# Altium PCB PreCharge.PcbDoc (part 2 of 2)
Units mil, origin at the board's own origin, x right, y up, seen from the top; angles counter-clockwise.
Board outline 4330.71 x 3149.61 mil, 2 copper layers (Component Side, Bottom Layer), stack 12.8 mil thick; 87 components, 44 nets, 242 pads, 58 vias.
Unrouted connection lines stored in the file: 38.
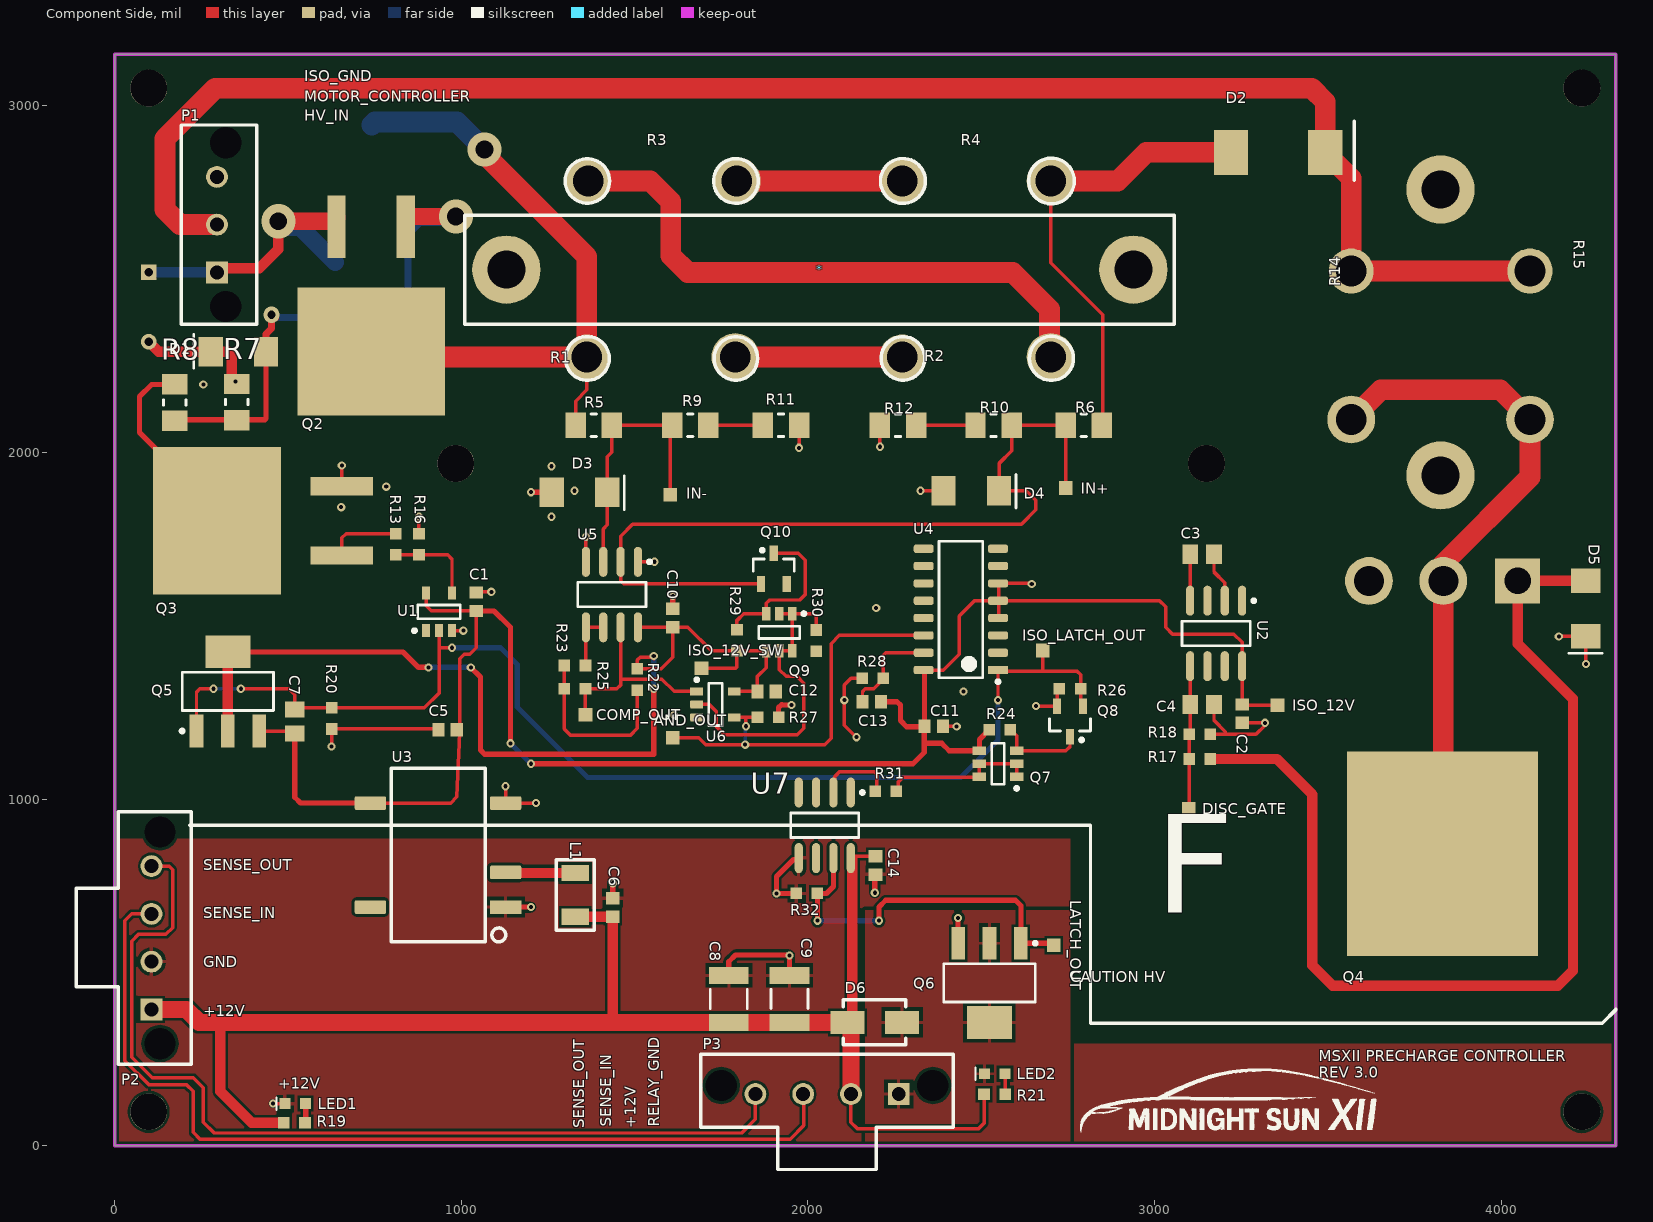
[diagram p0: Component Side view]

## Part data (continued)
R17: "RES SMD 40.2 OHM 0.5% 1/10W 0603", Manufacturer 1=Yageo, Manufacturer Part Number 1=RT0603DRE0740R2L, Operating Temperature="-55°C ~ 155°C", Package / Case="0603 (1608 Metric)", Power=1/10W, Resistance=40.2, Supplier Device Package=0603, Supplier Part Number 1=311-2576-1-ND, Temperature Coefficient=±50ppm/°C, Tolerance=±0.5%, ComponentLink1Description=http://www.yageo.com/documents/recent/PYu-RT_1-to-0.01_RoHS_L_7.pdf, ComponentLink1URL=http://www.yageo.com/documents/recent/PYu-RT_1-to-0.01_RoHS_L_7.pdf, Composition="Thin Film", Failure Rate=-, Height - Seated (Max)="0.022\" (0.55mm)", Packaging="Cut Tape (CT)", Part Status=Active, Size / Dimension="0.063\" L x 0.031\" W (1.60mm x 0.80mm)", Supplier 1=Digi-Key
R22: "100 Ohm ±1% 0.1W, 1/10W Chip Resistor 0603 (1608 Metric) Moisture Resistant Thick Film", Manufacturer 1=Yageo, Manufacturer Part Number 1=RC0603FR-07100RL, Operating Temperature="-55°C ~ 155°C", Package / Case="0603 (1608 Metric)", Power=1/10W, Resistance=100, Supplier Device Package=0603, Supplier Part Number 1=311-100HRCT-ND, Temperature Coefficient=±100ppm/°C, Tolerance=±1%, ComponentLink1Description=http://www.yageo.com/documents/recent/PYu-RC_Group_51_RoHS_L_7.pdf, ComponentLink1URL=http://www.yageo.com/documents/recent/PYu-RC_Group_51_RoHS_L_7.pdf, Composition="Thick Film", Failure Rate=-, Height - Seated (Max)="0.022\" (0.55mm)", Packaging="Cut Tape (CT)", Part Status=Active, Size / Dimension="0.063\" L x 0.031\" W (1.60mm x 0.80mm)", Supplier 1=Digi-Key
R23: "RES SMD 33K OHM 1% 1/4W 0603", Manufacturer 1="Panasonic Electronic Components", Manufacturer Part Number 1=ERJ-PA3F3302V, Operating Temperature="-55°C ~ 155°C", Package / Case="0603 (1608 Metric)", Power=1/4W, Resistance=33k, Supplier Device Package=0603, Supplier Part Number 1=P33KBYCT-ND, Temperature Coefficient=±100ppm/°C, Tolerance=±1%, ComponentLink1Description=https://industrial.panasonic.com/cdbs/www-data/pdf/RDO0000/AOA0000C291.pdf, ComponentLink1URL=https://industrial.panasonic.com/cdbs/www-data/pdf/RDO0000/AOA0000C291.pdf, Composition="Thick Film", Failure Rate=-, Height - Seated (Max)="0.022\" (0.55mm)", Packaging="Cut Tape (CT)", Part Status=Active, Size / Dimension="0.063\" L x 0.031\" W (1.60mm x 0.80mm)", Supplier 1=Digi-Key
R25: "RES SMD 6.8K OHM 1% 1/10W 0603", Manufacturer 1="Stackpole Electronics Inc.", Manufacturer Part Number 1=RMCF0603FT6K80, Operating Temperature="-55°C ~ 155°C", Package / Case="0603 (1608 Metric)", Power=1/10W, Resistance=6.8k, Supplier Device Package=0603, Supplier Part Number 1=RMCF0603FT6K80CT-ND, Temperature Coefficient=±100ppm/°C, Tolerance=±1%, ComponentLink1Description=https://www.seielect.com/Catalog/SEI-RMCF_RMCP.pdf, ComponentLink1URL=https://www.seielect.com/Catalog/SEI-RMCF_RMCP.pdf, Composition="Thick Film", Failure Rate=-, Height - Seated (Max)="0.022\" (0.55mm)", Packaging="Cut Tape (CT)", Part Status=Active, Size / Dimension="0.061\" L x 0.031\" W (1.55mm x 0.80mm)", Supplier 1=Digi-Key
R31: library part "RES 1K OHM 5% 1/10W 0603", "1k Ohm ±5% 0.1W, 1/10W Chip Resistor 0603 (1608 Metric)", Manufacturer=Yageo, Manufacturer Part Number=RC0603JR-071KL, Operating Temperature="-55°C ~ 155°C", Package / Case="0603 (1608 Metric)", Power (Watts)="0.1W, 1/10W", Resistance (Ohms)=1k, Supplier Device Package=0603, Supplier Part Number 1=311-1.0KGRCT-ND, Temperature Coefficient=±100ppm/°C, Tolerance=±5%, Category=Resistors, ComponentLink1Description=http://www.yageo.com/documents/recent/PYu-RC_Group_51_RoHS_L_7.pdf, ComponentLink1URL=http://www.yageo.com/documents/recent/PYu-RC_Group_51_RoHS_L_7.pdf, Composition="Thick Film", Failure Rate=-, Features="Moisture Resistant", Height - Seated (Max)="0.022\" (0.55mm)", Packaging="Cut Tape (CT)", Part Status=Active, Pricing 1="1=0.15, 10=0.017, 100=0.0071, 1000=0.0032, 2500=0.00278 (CAD)", RoHS="RoHS Compliant", Size / Dimension="0.063\" L x 0.031\" W (1.60mm x 0.80mm)", Stock 1=4415240, Supplier 1=Digi-Key
U1: library part "IC INVERTER SCHMITT 1CH 5SSOP", "Inverter IC 1 Channel Schmitt Trigger 5-SSOP", Case/Package=SSOP, High Level Output Current=3.4mA, Manufacturer=Rohm, Manufacturer Part Number=BU4S584G2-TR, Max Operating Temperature=85°C, Max Supply Voltage=16V, Min Operating Temperature=-40°C, Min Supply Voltage=3V, Package Quantity=3000, Quiescent Current=1uA, Supplier Part Number 1=BU4S584G2DKR-ND, ComponentLink1Description=https://datasheet.ciiva.com/16203/bu4s584g2-e-16203782.pdf, ComponentLink1URL=https://datasheet.ciiva.com/16203/bu4s584g2-e-16203782.pdf, ComponentLink2Description=https://datasheet.ciiva.com/8247/bu4s01g2-e-8247480.pdf, ComponentLink2URL=https://datasheet.ciiva.com/8247/bu4s01g2-e-8247480.pdf, ComponentLink3Description=https://datasheet.ciiva.com/1863/bu4s01g2-e-1863485.pdf, ComponentLink3URL=https://datasheet.ciiva.com/1863/bu4s01g2-e-1863485.pdf, ComponentLink4Description=https://datasheet.ciiva.com/1863/bu4s01g2-e-1863486.pdf, ComponentLink4URL=https://datasheet.ciiva.com/1863/bu4s01g2-e-1863486.pdf, ComponentLink5Description=https://datasheet.ciiva.com/15089/getdatasheetpartid-451247-15089726.pdf, ComponentLink5URL=https://datasheet.ciiva.com/15089/getdatasheetpartid-451247-15089726.pdf, ComponentLink6Description=https://datasheet.ciiva.com/1863/bu4s01g2-e-1863487.pdf, ComponentLink6URL=https://datasheet.ciiva.com/1863/bu4s01g2-e-1863487.pdf, ComponentLink7Description=https://datasheet.ciiva.com/26865/bu4s584g2-tr-26865344.pdf, ComponentLink7URL=https://datasheet.ciiva.com/26865/bu4s584g2-tr-26865344.pdf, ComponentLink8Description=https://datasheet.ciiva.com/26326/140506-da-01-en-ic-bu4s584g2-tr-ssop5-26326013.pdf, ComponentLink8URL=https://datasheet.ciiva.com/26326/140506-da-01-en-ic-bu4s584g2-tr-ssop5-26326013.pdf, Contact Plating=Copper,Tin, Lead Free="Lead Free", Logic Function="Schmitt Trigger,Buffer,Inverter", Low Level Output Current=3.4mA, Mount="Surface Mount", Number of Circuits=1, Number of Elements=1, Number of Gates=1, Number of Inputs=1, Number of Pins=5, Packaging="Tape and Reel", Pricing 1="1=0.68, 10=0.571, 25=0.4996, 100=0.4283, 250=0.37116, 500=0.31406, 1000=0.24269 (USD)", Propagation Delay=50ns, Radiation Hardening=No, REACH SVHC=Unknown, Stock 1=28906, Supplier 1=Digi-Key, Turn-On Delay Time=50ns
U2: "Charge Pump Switching Regulator IC Positive or Negative Fixed -Vin, 2Vin 1 Output 20mA 8-SOIC (0.154\", 3.90mm Width)", Case/Package=SOIC, Manufacturer=Microchip, Manufacturer Part Number=TC7662BEOA713, Max Input Voltage=15V, Max Operating Temperature=85°C, Max Output Current=20mA, Max Output Voltage=-15V, Min Operating Temperature=-40°C, Min Supply Voltage=1.5V, Output Power=470mW, Package Quantity=1, Supplier Part Number 1=TC7662BEOA713CT-ND, Switching Frequency=35kHz, ComponentLink1Description=https://datasheet.ciiva.com/2024/21469a-2024368.pdf, ComponentLink1URL=https://datasheet.ciiva.com/2024/21469a-2024368.pdf, ComponentLink2Description=https://datasheet.ciiva.com/2024/filehandler-aspxddocname-en026002-2024369.pdf, ComponentLink2URL=https://datasheet.ciiva.com/2024/filehandler-aspxddocname-en026002-2024369.pdf, ComponentLink3Description=https://datasheet.ciiva.com/16295/filehandler-aspxddocname-en011347-16295442.pdf, ComponentLink3URL=https://datasheet.ciiva.com/16295/filehandler-aspxddocname-en011347-16295442.pdf, ComponentLink4Description=https://datasheet.ciiva.com/3216/cn-21469a-3216331.pdf, ComponentLink4URL=https://datasheet.ciiva.com/3216/cn-21469a-3216331.pdf, ComponentLink5Description=https://datasheet.ciiva.com/18553/filehandler-aspxddocname-en026002-18553038.pdf, ComponentLink5URL=https://datasheet.ciiva.com/18553/filehandler-aspxddocname-en026002-18553038.pdf, ComponentLink6Description=https://datasheet.ciiva.com/4875/21469a-4875151.pdf, ComponentLink6URL=https://datasheet.ciiva.com/4875/21469a-4875151.pdf, Height=1.5mm, Lead Free="Lead Free", Length=5mm, Logic Function=Inverting, Max Supply Voltage=15V, Mount="Surface Mount", Number of Outputs=1, Number of Pins=8, Output Current=20mA, Output Voltage=-15V, Packaging="Tape and Reel", Pricing 1="1=2.29, 25=1.9056, 100=1.7304 (USD)", Radiation Hardening=No, Stock 1=59, Supplier 1=Digi-Key, Synchronous Rectifier=No, Topology="Charge Pump", Weight=0.006596oz, Width=3.99mm
U3: "Isolated Module DC DC Converter 1 Output 12V 84mA 10.8V - 13.2V Input", Current - Output (Max)=84mA, Manufacturer 1="XP Power", Manufacturer Part Number 1=ISE1212A, Operating Temperature="-40°C ~ 105°C", Package / Case="8-SMD Module, 5 Leads", Power=1W, Supplier Part Number 1=1470-2950-1-ND, Voltage - Input (Max)=13.2V, Voltage - Input (Min)=10.8V, Voltage - Isolation="1.5kV (1500V)", Voltage - Output 1=12V, Voltage - Output 2=-, ComponentLink1Description=http://www.xppower.com/Portals/0/pdfs/SF_ISE.pdf, ComponentLink1URL=http://www.xppower.com/Portals/0/pdfs/SF_ISE.pdf, Efficiency=81%, Mounting Type="Surface Mount", Number of Outputs=1, Packaging="Cut Tape (CT)", Part Status=Active, Size / Dimension="0.50\" L x 0.44\" W x 0.29\" H (12.7mm x 11.2mm x 7.3mm)", Supplier 1=Digi-Key, Type="Isolated DCDC", Voltage - Output 3=-
U4: "S-R Latch 4 Channel 1:1 IC Tri-State 16-TSSOP", Current - Output High, Low="6.8mA, 6.8mA", Manufacturer 1="Texas Instruments", Manufacturer Part Number 1=CD4043BDR, Operating Temperature="-55°C ~ 125°C", Package / Case="16-SOIC (0.154\", 3.90mm Width)", Supplier Device Package=16-SOIC, Supplier Part Number 1=296-31496-1-ND, Voltage - Supply="3 V ~ 18 V", Circuit=1:1, ComponentLink1Description=http://www.ti.com/lit/ds/symlink/cd4043b.pdf, ComponentLink1URL=http://www.ti.com/lit/ds/symlink/cd4043b.pdf, Delay Time - Propagation=50ns, Logic Type="S-R Latch", Mounting Type="Surface Mount", Output Type=Tri-State, Packaging="Cut Tape (CT)", Part Status=Active, Supplier 1=Digi-Key
U5: "Comparator General Purpose DTL, MOS, Open-Collector, Open-Emitter, RTL, TTL 8-SOIC", Current - Input Bias (Max)="0.25µA @ ±15V", Current - Output (Typ)=-, Current - Quiescent (Max)=7.5mA, Manufacturer 1="Texas Instruments", Manufacturer Part Number 1=LM311M/NOPB, Operating Temperature="0°C ~ 70°C", Package / Case="8-SOIC (0.154\", 3.90mm Width)", Supplier Device Package=8-SOIC, Supplier Part Number 1=LM311MNS/NOPB-ND, Voltage - Input Offset (Max)="7.5mV @ ±15V", Voltage - Supply, Single/Dual (±)="5 V ~ 36 V, ±2.5 V ~ 18 V", CMRR, PSRR (Typ)=-, ComponentLink1Description=http://www.ti.com/lit/ds/symlink/lm311-n.pdf, ComponentLink1URL=http://www.ti.com/lit/ds/symlink/lm311-n.pdf, Hysteresis=-, Mounting Type="Surface Mount", Output Type="DTL, MOS, Open-Collector, Open-Emitter, RTL, TTL", Packaging=Tube, Part Status=Active, Propagation Delay (Max)=-, Supplier 1=Digi-Key, Type="General Purpose"
U6: "AND Gate IC 1 Channel 5-SSOP", Current - Output High, Low="3.4mA, 3.4mA", Current - Quiescent (Max)=1µA, Manufacturer 1="Rohm Semiconductor", Manufacturer Part Number 1=BU4S81G2-TR, Operating Temperature="-40°C ~ 85°C", Package / Case="SC-74A, SOT-753", Supplier Device Package=5-SSOP, Supplier Part Number 1=BU4S81G2CT-ND, Voltage - Supply="3 V ~ 16 V", ComponentLink1Description=http://rohmfs.rohm.com/en/products/databook/datasheet/ic/logic_switch/standard_logic/bu4s81g2-e.pdf, ComponentLink1URL=http://rohmfs.rohm.com/en/products/databook/datasheet/ic/logic_switch/standard_logic/bu4s81g2-e.pdf, Logic Level - High="3.5 V ~ 11 V", Logic Level - Low="1.5 V ~ 4 V", Logic Type="AND Gate", Max Propagation Delay @ V, Max CL="30ns @ 15V, 50pF", Mounting Type="Surface Mount", Number of Circuits=1, Number of Inputs=2, Packaging="Cut Tape (CT)", Part Status=Active, Supplier 1=Digi-Key
U7: "Logic Output Optoisolator 5MBd Push-Pull, Totem Pole 3750Vrms 1 Channel 5kV/µs, 10kV/µs CMTI 8-SO Tall", Supplier Part Number 1=516-1625-5-ND, ComponentLink1Description=https://www.digikey.ca/products/en?keywords=HCPL-0211-000E, ComponentLink1URL=https://www.digikey.ca/products/en?keywords=HCPL-0211-000E, Supplier 1=Digi-Key

## Free pads (board coordinates)
  round 106.3 hole 106.3: ""(98.43,98.43) ""(98.43,3051.18) ""(984.25,1968.5) ""(3149.61,1968.5) ""(4232.28,98.43) ""(4232.28,3051.18)

## Via types
v1: diameter 23.62, hole 11.81, Component Side to Bottom Layer, tented both sides, 54 vias
v2: diameter 98.43, hole 51.18, Component Side to Bottom Layer, tented both sides, 2 vias
v3: diameter 47.24, hole 23.62, Component Side to Bottom Layer, tented both sides, 1 vias
v4: diameter 98.43, hole 51.18, Component Side to Bottom Layer, 1 vias

## Nets (pads, with @x,y where several pads share a name; then routed paths per layer and width w, separated by ;. In a path a pad name is that pad's centre, name@x,y a point inside that pad or via, vN(x,y) a via of type N, cw(c..) or ccw(c..) an arc to the next point about the centre after c; other vN are vias at no path point)
+12V: C6.2 C8.1 C9.1 C14.1 D6.2 L1.1 P2.1 P3.2 R19.2 R21.1 U7.8 | length 4177.6
  Component Side w10: P3.2 2124.02,67.91 2141.73,50.2 2493.11,50.2 2507.87,64.96 R21.1 ; U7.8@2127.36,826.54 2136.46,835.63 C14.1
  Component Side w30: 305.12,356.3 305.12,157.48 395.67,66.93 R19.2 ; L1.1 C6.2 1437.01,356.3 ; D6.2 2127.36,369.49 U7.8@2127.36,826.54
  Component Side w50: P2.1 206.69,393.7 244.09,356.3 305.12,356.3 1437.01,356.3 C8.1 C9.1 D6.2 2124.02,346.46 P3.2
GND: C6.1 C8.2 C9.2 C14.2 LED1.2 P2.2 Q6.3 R32.2 U3.1 U7.5 | length 742.6
  Component Side w10: v1(456.69,122.05) LED1.2
  Component Side w15: U3.1 v1(1200.79,688.98) ; C6.1 v1(1437.01,757.87) ; C8.2 1771.65,531.5 1791.34,551.18 1944.88,551.18 v1(1946.85,549.21) C9.2 ; R32.2 v1(1909.45,728.35) 1909.45,777.56 1958.43,826.54 U7.5@1977.36,826.54 ; v1(2192.91,730.31) C14.2@2192.91,773.62 ; Q6.3 v1(2433.07,657.48)
HV_IN: F1.1 P1.1 | length 196.9
  Bottom Layer w30: F1.1 P1.1
ISO_12V: C1.1 C2.2 C5.2 C7.1 C11.2 C13.2 ISO_12V.TP Q5.3 Q7.4 R24.1 U1.5 U2.8 U3.5 U4.5 U4.16 | length 5262.4
  Component Side w10: Q5.3 C7.1@519.68,1196.85 ; U3.5 969.29,988.98 987.2,1006.89 996.06,1192.91 996.06,1405.51 1008.41,1417.86 1024.15,1417.86 1043.31,1437.01 C1.1 913.39,1543.31 898.43,1558.27 U1.5 ; U4.16 2390.35,1372.63 2436.18,1418.46 2436.18,1528.5 2480.31,1572.63 U4.5@2532.16,1572.63 ; U4.5@2567.91,1572.63 3013.98,1572.63 3031.5,1555.12 3031.5,1496.49 3051.61,1476.38 3228.35,1476.38 3252.36,1452.36 U2.8 C2.2 ; C2.2@3254.33,1271.65 ISO_12V.TP
  Component Side w15: C7.1 519.68,1005.91 536.61,988.98 U3.5 ; C1.1 1094.49,1543.31 1141.73,1496.06 v1(1141.73,1161.42) ; v1(1200.79,1102.36) 2303.31,1102.36 2335.47,1134.52 2335.47,1161.42 ; C13.2 2257.12,1281.19 2266.65,1271.65 2266.65,1227.13 2284.45,1209.34 C11.2@2335.47,1209.34 ; U4.16 2336.45,1369.84 C11.2 C11.2@2335.47,1209.34 ; R24.1 2494.49,1172.48 Q7.4 2407.32,1139.76 2385.66,1161.42 2335.47,1161.42 ; C2.2 C2.2@3254.33,1271.65 ; 2335.47,1161.42 C11.2@2335.47,1209.34
  Bottom Layer w15: v1(1141.73,1161.42) v1(1200.79,1102.36)
ISO_12V_SW: C10.2 C12.2 ISO_12V_SW.TP Q5.2 Q5.4 Q9.4 R22.1 R29.1 U5.8 U6.5 | length 3017.8
  Component Side w10: U5.8 C10.2 ; v1(1555.12,1413.39) 1555.12,1405.51 1551.18,1409.45 1515.75,1409.45 1507.87,1401.57 R22.1 1576.77,1375.98 1610.24,1409.45 C10.2 ; ISO_12V_SW.TP 1791.34,1377.95 1795.28,1381.89 R29.1 ; U6.5 C12.2 1854.33,1354.33 1879.92,1379.92 Q9.4 R29.1 ; C10.2 1653.54,1496.06 1721.65,1427.95 R29.1
  Component Side w15: Q5.4 832.28,1425.2 876.98,1380.5 v1(905.51,1380.5) ; v1(1027.56,1380.5) 1055.12,1352.94 1055.12,1141.73 1066.93,1129.92 1555.12,1129.92 v1(1555.12,1318.9)
  Component Side w30: Q5.2 Q5.4
  Bottom Layer w15: v1(905.51,1380.5) v1(1027.56,1380.5) ; v1(1555.12,1318.9) v1(1555.12,1413.39)
ISO_GND: C1.2 C2.1 C4.2 C5.1 C10.1 C11.1 C12.1 D3.1 D4.1 D5.2 P1.3 Q3.3 Q4.3 Q8.2 Q10.2 R11.2 R12.2 R16.2 R18.2 R20.2 R26.1 R27.1 R28.1 R30.2 U1.3 U2.3 U3.4 U4.3 U4.4 U4.6 U4.7 U4.8 U4.11 U4.12 U5.1 U5.4 U6.3 U7.3 | length 2255.5
  Component Side w10: v1(625.98,1152.56) R20.2 C5.1@925.98,1202.76 ; Q3.3 v1(655.51,1962.6) ; R16.2 v1(877.95,1814.96) ; U1.3 v1(1005.91,1486.22) ; C1.2 1043.31,1598.43 v1(1086.61,1598.43) ; v1(1127.95,1037.4) U3.4 v1(1215.75,988.98) ; U5.4 v1(1359.45,1757.09) ; U5.1 v1(1557.09,1685.04) ; v1(1974.41,2013.78) R11.2 ; v1(2139.76,1179.13) 2104.88,1214.02 v1(2104.88,1285.75) 2104.88,1329.53 2124.21,1348.85 R28.1 ; v1(2207.68,2016.73) R12.2 ; v1(2324.8,1889.76) D4.1 ; U4.12 U4.12@2353.08,1572.63 ; C11.1 v1(2428.97,1210.32) ; U4.6 U4.6@2550.04,1622.63 ; U4.4@2550.04,1533.35 U4.6@2550.04,1622.63 ; v1(2645.57,1621.06) 2644,1622.63 U4.6@2550.04,1622.63 ; v1(2657.48,1268.7) Q8.2 2718.5,1312.01 R26.1 ; R18.2 3203.74,1187.01 ; C4.2 3171.26,1227.36 3203.74,1194.88 3203.74,1187.01 ; C2.1 v1(3317.91,1220.47) 3317.91,1212.6 3292.32,1187.01 3203.74,1187.01 ; v1(4165.91,1469.92) D5.2 v1(4244.09,1389.76)
  Component Side w15: C5.1@925.98,1202.76 C5.1@935.83,1192.91 ; v1(1200.79,1885.83) D3.1 ; C10.1 v1(1610.24,1586.61) ; U6.3@1677.17,1234.25 U6.3 ; R27.1 1915.35,1264.76 1924.21,1273.62 1926.18,1271.65 v1(1952.76,1271.65)
  other v1: 1613.19,1243.11 2448.66,1310.54 2196.85,1551.74 1259.84,1814.96 653.54,1842.52 1326.77,1889.76 783.46,1901.57 1259.84,1960.63 255.91,2196.79
NetAND_OUT_TP: AND_OUT.TP R27.2 U4.14 U6.4 | length 1160.5
  Component Side w10: AND_OUT.TP 1685.04,1177.17 1704.73,1157.48 v1(1818.89,1157.48) 2048.41,1157.48 2066.84,1175.9 2066.84,1448.92 2090.55,1472.63 2320.92,1472.63 U4.14@2317.6,1475.95 ; U6.4 1820.87,1236.22 ; v1(1820.87,1210.63) 1820.87,1236.22 ; R27.2 1820.87,1236.22
  Bottom Layer w10: v1(1818.89,1157.48) 1818.89,1208.66 v1(1820.87,1210.63)
NetC3_1: C3.1 U2.2 | length 146.7
  Component Side w10: C3.1 3171.26,1655.51 3202.36,1624.41 U2.2
NetC3_2: C3.2 U2.4 | length 133.9
  Component Side w10: U2.4 C3.2
NetC4_1: C4.1 DISC_GATE.TP R17.1 R18.1 U2.5 | length 413
  Component Side w10: DISC_GATE.TP 3099.41,973.43 R17.1 R18.1 3102.36,1189.96 C4.1 U2.5
NetC7_2: C7.2 ISO_LATCH_OUT.TP Q5.1 Q8.3 R20.1 R26.2 U1.2 U4.1 | length 3522.8
  Component Side w10: Q5.1 236.22,1309.06 246.06,1318.9 v1(285.43,1318.9) ; v1(364.17,1318.9) 501.97,1318.9 519.68,1301.18 C7.2 ; C7.2@543.31,1265.75 545.28,1263.78 R20.1 893.7,1263.78 935.83,1305.91 935.83,1437.01 ; U1.2 935.83,1437.01 ; v1(973.23,1437.01) 935.83,1437.01 ; v1(2548.23,1285.75) U4.1 2551.02,1369.84 2677.17,1369.84 ; ISO_LATCH_OUT.TP 2677.17,1369.84 ; Q8.3 2786.42,1275.59 R26.2 2786.42,1359.01 2775.59,1369.84 2677.17,1369.84
  Bottom Layer w10: v1(285.43,1318.9) v1(364.17,1318.9)
  Bottom Layer w15: v1(973.23,1437.01) 1113.24,1437.01 1161.42,1388.83 1161.42,1266.16 1364.59,1062.99 2440.94,1062.99 2548.23,1170.28 v1(2548.23,1285.75)
NetC13_1: C13.1 R28.2 U4.15 | length 292.6
  Component Side w10: C13.1 2157.32,1310.54 2165.2,1318.42 2189.48,1318.42 2217.43,1346.36 R28.2 2217.43,1415.46 2224.6,1422.63 U4.15
NetCOMP_OUT_TP: COMP_OUT.TP R25.2 U5.7 U6.1 | length 581.3
  Component Side w10: COMP_OUT.TP R25.2 1448.82,1318.9 1459.45,1329.53 1459.45,1346.46 ; U5.7 1459.45,1346.46 ; U6.1 1614.17,1311.02 1578.82,1346.38 1485.81,1346.38 1485.73,1346.46 1459.45,1346.46
NetD1_1: D1.1 Q1.1 Q2.1 R7.2 R8.1 | length 1463.5
  Component Side w15: R8.1@173.23,2094.49 358.27,2094.49 433.07,2094.49 437.01,2098.43 437.01,2273.07 D1.1@446.14,2282.2
  Component Side w20: D1.1 437.01,2342.52 452.76,2358.27 v3(452.76,2397.63) 455.59,2397.63 v3@464.57,2388.66
  Component Side w50: Q2.1@841.73,2681.1 v2(984.25,2681.1)
  Bottom Layer w20: v3(452.76,2397.63) 456.69,2397.63 456.69,2405.51 472.44,2389.76 775.59,2389.76 846.46,2460.63 Q1.1@846.46,2584.65
  Bottom Layer w50: Q1.1@841.73,2584.65 841.73,2593.38 841.73,2644.88 875,2678.15 v2@939.96,2678.15 ; v2(984.25,2681.1) v2@984.25,2687.01
NetD1_2: D1.2 F1.2 Q1.3 Q2.3 R7.1 | length 1044.7
  Component Side w15: D1.2@299.21,2295.28 D1.2@307.09,2295.28
  Component Side w30: F1.2 126.77,2291.34 D1.2 328.66,2291.34 337.8,2282.2 337.8,2207.41 352.62,2207.41 R7.1 ; 295.28,2530.75 295.28,2519.68 307.09,2531.5 417.32,2531.5 472.44,2586.61 v4(472.44,2667.32)
  Component Side w50: v4(472.44,2667.32) 631.89,2667.32 Q2.3@641.73,2677.17
  Bottom Layer w50: v4(472.44,2667.32) 475.76,2667.32 492.88,2650.2 535.24,2650.2 Q1.3
NetD2_1: D2.1 P1.2 R14.1 R15.1 | length 4830.3
  Component Side w60: P1.2 188.98,2657.48 145.67,2700.79 145.67,2905.51 291.34,3051.18 3452.76,3051.18 3492.13,3011.81 D2.1 3566.93,2791.34 R14.1 R15.1
NetD2_2: D2.2 R4.2 R6.1 | length 1323
  Component Side w10: R4.2 2700,2548.03 2850.39,2397.64 2850.39,2081.69 R6.1
  Component Side w60: R4.2 2893.7,2783.46 2976.38,2866.14 D2.2
NetD3_2: D3.2 IN-.TP R5.2 R9.1 U5.3 | length 781.3
  Component Side w10: U5.3 1409.45,1779.53 1421.26,1791.34 D3.2 1421.26,1988.19 1434.06,2000.98 R5.2 R9.1 1602.36,2072.83 IN-.TP
NetD4_2: D4.2 IN+.TP Q10.3 R6.2 R10.1 U5.2 | length 2452.5
  Component Side w10: Q10.3 1469.19,1621.06 1459.45,1630.8 U5.2 1459.45,1758.66 1493.94,1793.15 2615.98,1793.15 2657.48,1834.65 2657.48,1862.2 2629.92,1889.76 D4.2 2551.18,1968.5 2587.6,2004.92 R10.1 R6.2 2744.09,2077.76 IN+.TP
NetD5_1: D5.1 Q4.1 R17.2 | length 3010.1
  Component Side w30: R17.2 3352.36,1116.14 3454.72,1013.78 3454.72,521.65 3513.78,462.6 4163.39,462.6 4206.69,505.91 4206.69,1289.37 4047.24,1448.82 Q4.1 D5.1
NetL1_2: L1.2 U3.2 | length 201.4
  Component Side w30: U3.2 1129.53,787.4 L1.2
NetLATCH_OUT_TP: LATCH_OUT.TP Q6.1 R32.1 U7.7 | length 1061.2
  Component Side w15: v1(2027.36,649.8) R32.1 2053.72,728.35 2073.43,748.05 U7.7 ; v1(2204.53,649.8) 2204.53,688.78 2224.41,708.66 2598.43,708.66 2614.17,692.91 Q6.1 2702.76,584.65 LATCH_OUT.TP
  Bottom Layer w15: v1(2027.36,649.8) v1(2204.53,649.8) v1@2204.72,649.61
NetLED1_1: LED1.1 R19.1 | length 55.9
  Component Side w15: R19.1 551.18,68.9 LED1.1
NetLED2_1: LED2.1 R21.2 | length 58.7
  Component Side w10: R21.2 LED2.1
NetQ1_4: Q1.4 Q2.4 R1.1 R5.1 | length 1891.4
  Component Side w10: R5.1 1329.72,2148.62 1362.2,2181.1 R1.1
  Component Side w60: Q2.4@783.07,2275.59 R1.1 1362.2,2564.96 1053.15,2874.02 v2(1066.93,2874.02)
  Bottom Layer w60: Q1.4@741.73,2944.88 750.46,2953.61 987.33,2953.61 v2(1066.93,2874.02)
NetQ3_1: Q3.1 R13.1 | length 211.4
  Component Side w10: Q3.1 655.51,1753.94 667.72,1766.14 R13.1
NetQ3_4: Q3.4 R8.2 | length 566.7
  Component Side w15: R8.2 107.09,2196.79 72.13,2161.83 72.13,2057.79 295.28,1834.65 Q3.4
NetQ4_2: Q4.2 R14.2 R15.2 | length 1944
  Component Side w60: R14.2 3652.76,2181.1 3996.85,2181.1 R15.2 4082.68,1929.13 3832.68,1679.13 3832.68,1629.92 3832.68,844.49 Q4.2@3830.71,842.52
NetQ7_1: Q7.1 Q7.2 Q7.5 Q7.6 R31.1 | length 438.8
  Component Side w10: R31.1@2259.84,1033.62 2259.84,1048.79 2274.05,1062.99 2492.52,1062.99 Q7.6 Q7.5 Q7.2 Q7.1
NetQ7_3: Q7.3 Q8.1 R24.2 | length 255.9
  Component Side w10: R24.2 2601.97,1182.64 Q7.3 2744.09,1139.76 2755.91,1151.57 Q8.1
NetQ9_1: Q9.1 Q9.2 Q9.5 Q9.6 R30.1 U6.2 | length 943.4
  Component Side w10: U6.2 1714.57,1273.62 1736.22,1251.97 1736.22,1208.66 1758.94,1185.94 1969.41,1185.94 1988.19,1204.72 1988.19,1334.65 1968.5,1354.33 1937.01,1354.33 1917.32,1374.02 Q9.5 Q9.6 Q9.1 ; Q9.2 Q9.1 ; R30.1 2023.62,1527.56 2015.75,1535.43 Q9.1
NetQ9_3: Q9.3 Q10.1 R29.2 | length 469.4
  Component Side w10: R29.2 1795.28,1515.75 1814.96,1535.43 Q9.3 1879.92,1564.96 1889.76,1574.8 1976.38,1574.8 1992.13,1590.55 1992.13,1688.98 1971.46,1709.65 Q10.1
NetR1_2: R1.2 R2.1 | length 481.1
  Component Side w60: R1.2 R2.1
NetR2_2: R2.2 R3.1 | length 1714.2
  Component Side w60: R3.1 1545.28,2783.46 1604.33,2724.41 1604.33,2568.9 1653.54,2519.69 2590.55,2519.69 2696.85,2413.39 2696.85,2278.74 R2.2
NetR3_2: R3.2 R4.1 | length 477.2
  Component Side w60: R3.2 R4.1
NetR9_2: R9.2 R11.1 | length 157.5
  Component Side w10: R9.2 R11.1
NetR10_2: R10.2 R12.1 | length 171.3
  Component Side w10: R12.1 R10.2
NetR13_2: R13.2 R16.1 U1.4 | length 265.2
  Component Side w10: R13.2 877.56,1705.12 R16.1 960.63,1704.72 973.23,1692.13 U1.4
NetR22_2: R22.2 R23.2 R25.1 | length 519.4
  Component Side w10: R23.2 R25.1 1297.24,1202.76 1314.96,1185.04 1488.19,1185.04 1507.87,1204.72 R22.2
NetR23_1: R23.1 U5.5 U5.6 | length 160.7
  Component Side w10: R23.1 1359.45,1387.01 U5.5 U5.6
NetR31_2: R31.2 U7.2 | length 236.5
  Component Side w10: U7.2@2077.36,1015.51 2077.36,1065.55 2090.55,1078.74 2192.91,1078.74 2198.82,1072.83 R31.2@2198.82,1015.75
RELAY_GND: D6.1 LED2.2 P3.1 Q6.2 Q6.4
SENSE_IN: P2.3 P3.3 | length 2718
  Component Side w10: P2.3 49.21,669.29 29.53,649.61 29.53,246.06 98.43,177.17 206.69,177.17 226.38,157.48 226.38,39.37 246.3,19.45 1948.58,19.45 1988.19,59.06 1988.19,147.64 P3.3
SENSE_OUT: P2.4 P3.4 | length 2738.1
  Component Side w10: P2.4 157.48,807.09 167.32,797.24 167.32,629.92 147.64,610.24 68.9,610.24 49.21,590.55 49.21,255.91 108.27,196.85 226.38,196.85 255.91,167.32 255.91,68.9 287.48,37.32 1808.98,37.32 1848.43,76.77 P3.4
pads on no net: *.6 *.7 P1. P2. P3. U1.1 U2.1 U2.6 U2.7 U3.8 U4.2 U4.9 U4.10 U4.13 U7.1 U7.4 U7.6
copper on no net:
  other v1: 349.27,2204.72

## Polygon pours and split planes (outlines as drawn)
no net on Component Side "Component Side-No Net 3" (solid, pour order 26): 2696.85,1378.35
GND on Component Side "GND_L01_P016" (solid, pour order 16): 0,0 0,885.83 2755.91,885.83 2755.91,295.28 4330.71,295.28 4330.71,0
no net on Component Side "Component Side-No Net 4" (solid, pour order 12): 2066.93,0
RELAY_GND on Component Side "RELAY_GND_L01_P006" (solid, pour order 6): 2165.35,679.13 2165.35,0 2755.91,0 2755.91,679.13
no net on Component Side "Component Side-No Net" (solid, pour order 4): 777.56,2864.17
no net on Component Side "Component Side-No Net 1" (solid, pour order 2): 777.56,2854.33
no net on Component Side "Component Side-No Net 2" (solid, pour order 0): 787.4,2844.49
ISO_GND on Bottom Layer "ISO_GND_L02_P028" (solid, pour order 28): 0,3149.61 0,1004.38 2851.91,1004.38 2851.91,393.7 4330.71,393.7 4330.71,3149.61
GND on Bottom Layer "GND_L02_P014" (solid, pour order 14): 0,0 0,885.83 2755.91,885.83 2755.91,295.28 4330.71,295.28 4330.71,0

## Keep-outs
Keep-Out Layer:
  lines w10: 0,0 0,3149.29 ; 0.32,393.7 0.32,0 4330.71,0 4330.71,3149.61 0.32,3149.61

## Silkscreen, mask and mechanical layers (free items; w line width, h text height)
Top Overlay:
  drawing of 23 lines, arcs and shapes, not listed
  text "ISO_GND" at 547.24,3070.87 h31.5
  text "MOTOR_CONTROLLER" at 547.24,3011.81 h31.5
  text "HV_IN" at 547.24,2956.69 h31.5
  text "SENSE_OUT" at 255.91,795.28 h31.5
  text "SENSE_IN" at 255.91,657.48 h31.5
  text "F" at 3000,578.74 h500
  text "GND" at 255.91,515.75 h31.5
  text "CAUTION HV" at 2755.91,472.44 h31.5
  text "+12V" at 255.91,374.02 h31.5
  text "MSXII PRECHARGE CONTROLLER / REV 3.0" at 3473.03,196.85 h31.5
  text "+12V" at 472.44,165.35 h31.5
  text "SENSE_IN" at 1433.07,55.12 h31.5 r90
  text "RELAY_GND" at 1570.87,55.12 h31.5 r90
  text "SENSE_OUT" at 1354.33,51.18 h31.5 r90
  text "+12V" at 1503.94,51.18 h31.5 r90